# Altium PCB USB_Converter.PcbDoc
Units mm, origin at the board's own origin, x right, y up, seen from the top; angles counter-clockwise.
Board outline 30 x 14 mm, 2 copper layers (Top Layer, Bottom Layer); 8 components, 6 nets, 30 pads, 14 vias.
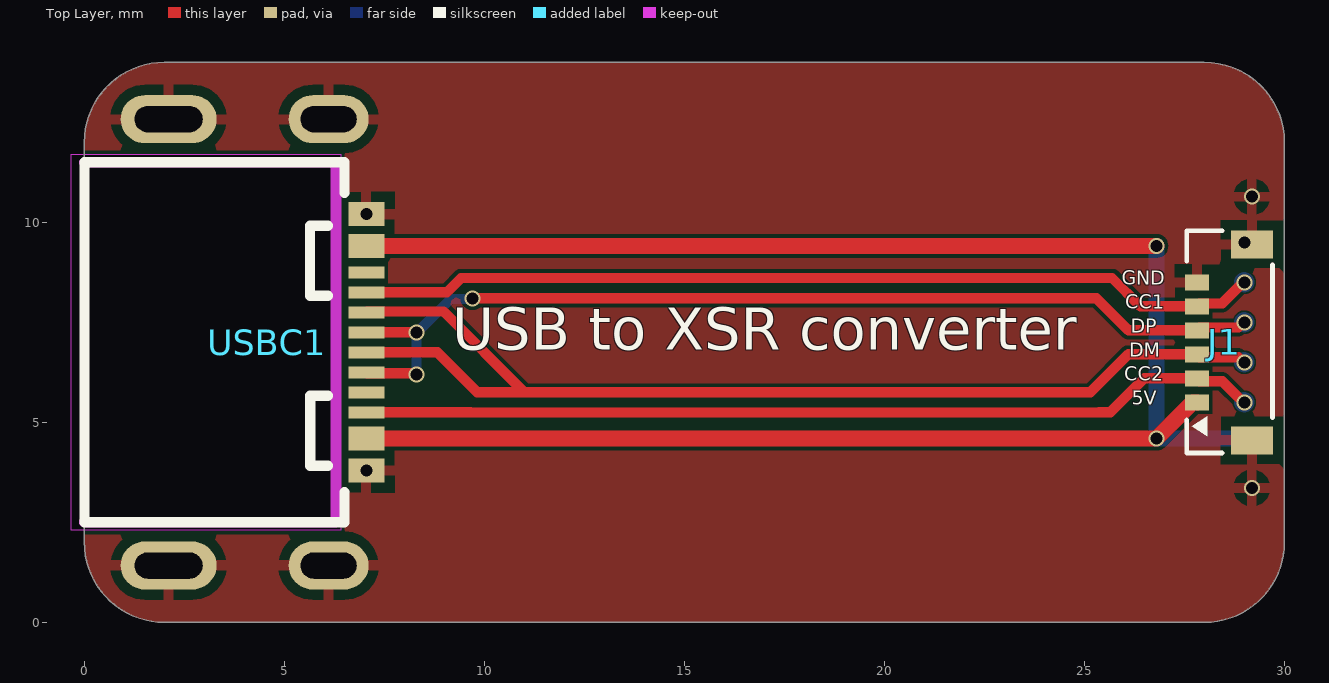
[diagram p0: Top Layer view]
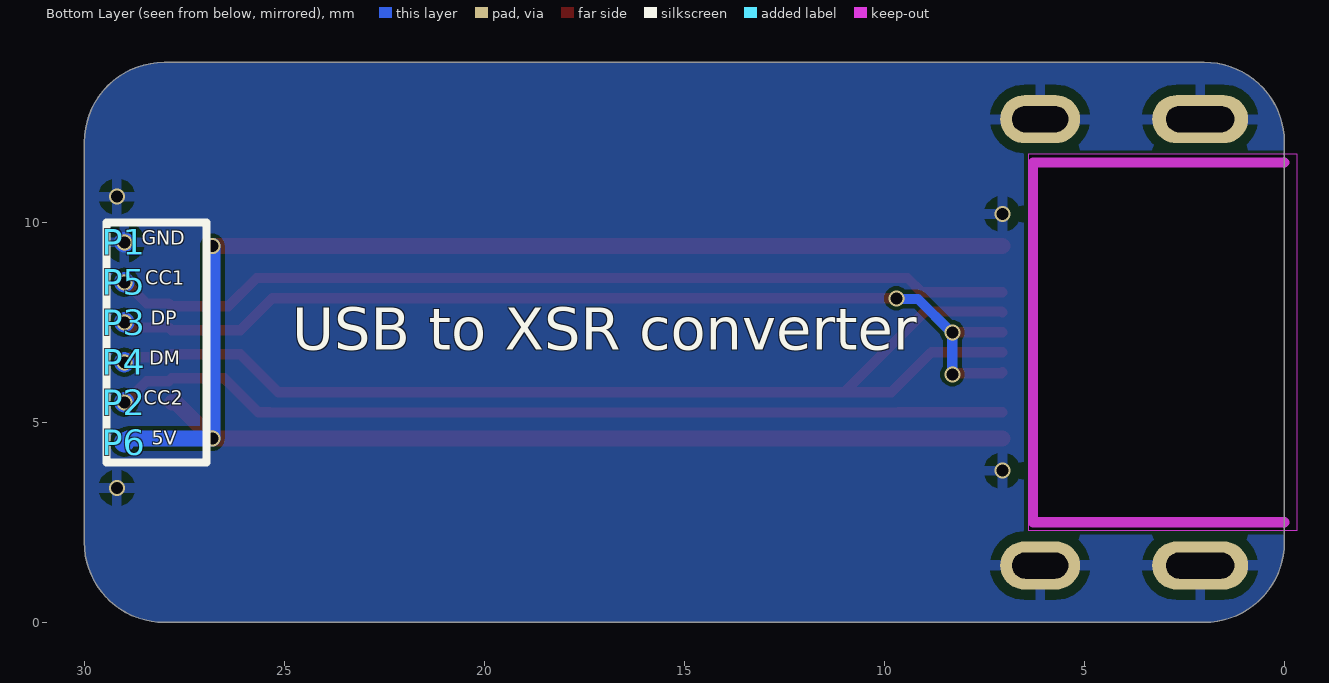
[diagram p1: Bottom Layer view, seen from below]

## Layer stack, top to bottom
Top Solder: solder mask 0.0102, Solder Resist, Dk 3.5
Top Layer: signal copper 0.0356
Dielectric 1: dielectric 0.32, FR-4, Dk 4.8
Bottom Layer: signal copper 0.0356
Bottom Solder: solder mask 0.0102, Solder Resist, Dk 3.5

## Board outline
0,2 0,12 cw(c2,12) 2,14 28,14 cw(c28,12) 30,12 30,2 cw(c28,2) 28,0 2,0 cw(c2,2)

## Design rules (kind name [scope] priority, off if disabled: settings)
AssemblyTestPointUsage [All] p1: isadvanced=TRUE
AssemblyTestpoint [All] p1: isadvanced=TRUE testpointundercomponent=TRUE minsize=1.016 maxsize=2.54 preferedsize=1.524 minholesize=0 maxholesize=1.016 preferedholesize=0.813 testpointgrid=0.025 usegrid=TRUE gridtolerance=0 allowsidetop=TRUE allowsidebottom=TRUE
Clearance Clearance_1 [OnMid vs OnMid] p1: gap=0.1 ignorepadtopadclearanceinfootprint=FALSE sourcerule=42 cellrowname=All cellrowtype=0 cellcolname=All cellcoltype=0 innerlayers=TRUE
Clearance Clearance_2 [(ExistsOnLayer('Top Layer') Or ExistsOnLayer('Bottom Layer')) vs (ExistsOnLayer('Top Layer') Or ExistsOnLayer('Bottom Layer'))] p2: gap=0.1 ignorepadtopadclearanceinfootprint=FALSE sourcerule=42 cellrowname=All cellrowtype=0 cellcolname=All cellcoltype=0 outerlayers=TRUE
Clearance [All] p3: gap=0.254 ignorepadtopadclearanceinfootprint=FALSE ismatrix=TRUE
ComponentClearance [All] p1: isadvanced=TRUE gap=0.254 collisioncheckmode=3 verticalgap=0.254 showdistances=FALSE
FabricationTestPointUsage [All] p1: isadvanced=TRUE valid=0 allowmultiple=FALSE
FabricationTestpoint [All] p1: isadvanced=TRUE side=3 testpointundercomponent=TRUE minsize=1.016 maxsize=2.54 preferedsize=1.524 minholesize=0 maxholesize=1.016 preferedholesize=0.813 testpointgrid=0.025 allowsidetop=TRUE allowsidebottom=TRUE usegrid=TRUE gridtolerance=0
FanoutControl Fanout_BGA [IsBGA] p1: isadvanced=TRUE bgadir=Out bgaviamode=Centered fanoutstyle=Auto fanoutdirection=Alternating viagrid=0.025 // Fanout_BGA (Default Rule)
FanoutControl Fanout_LCC [IsLCC] p2: isadvanced=TRUE bgadir=Out bgaviamode=Centered fanoutstyle=Auto fanoutdirection=Alternating viagrid=0.025 // Fanout_LCC (Default Rule)
FanoutControl Fanout_SOIC [IsSOIC] p3: isadvanced=TRUE bgadir=Out bgaviamode=Centered fanoutstyle=Auto fanoutdirection=Alternating viagrid=0.025 // Fanout_SOIC (Default Rule)
FanoutControl Fanout_Small [(CompPinCount < 5)] p4: isadvanced=TRUE bgadir=Out bgaviamode=Centered fanoutstyle=Auto fanoutdirection=OutThenIn viagrid=0.025 // Fanout_Small (Default Rule)
FanoutControl Fanout_Default [All] p5: isadvanced=TRUE bgadir=Out bgaviamode=Centered fanoutstyle=Auto fanoutdirection=Alternating viagrid=0.025 // Fanout_Default (Default Rule)
Height [All] p1: isadvanced=TRUE minheight=0 maxheight=25.4 prefheight=12.7
HoleSize [All] p1: isadvanced=TRUE absolutevalues=TRUE maxlimit=2.54 minlimit=0.025 maxpercent=80.000 minpercent=20.000
HoleToHoleClearance [All] p1: isadvanced=TRUE gap=0.254 allowstackedmicrovias=TRUE
LayerPairs [All] p1: isadvanced=TRUE enforce=TRUE
MinimumSolderMaskSliver [All] p1: isadvanced=TRUE minsoldermaskwidth=0.254
NetAntennae [All] p1: isadvanced=TRUE netantennaetolerance=0
PasteMaskExpansion [All] p1: isadvanced=TRUE expansion=0
PlaneClearance [All] p1: isadvanced=TRUE clearance=0.508
PlaneConnect [All] p1: isadvanced=TRUE planeconnectstyle=Relief reliefexpansion=0.508 reliefentries=4 reliefconductorwidth=0.254 reliefairgap=0.254
PolygonConnect [All] p1: connectstyle=Relief reliefconductorwidth=0.254 reliefentries=4 polygonreliefangle="90 Angle" airgapwidth=0.254
RoutingCorners [All] p1: isadvanced=TRUE cornerstyle=45-Degree minsetback=2.54 maxsetback=2.54
RoutingPriority [All] p1: isadvanced=TRUE routingpriority=0
RoutingVias [All] p1: holewidth=0.711 width=1.27 viastyle="Through Hole" minholewidth=0.711 minwidth=1.27 maxholewidth=0.711 maxwidth=1.27
ShortCircuit [All] p1: isadvanced=TRUE allowed=FALSE
SilkToSilkClearance [All] p1: isadvanced=TRUE silktosilkclearance=0.254
SilkToSolderMaskClearance [IsPad] p1: isadvanced=TRUE minsilkscreentomaskgap=0.254 clearancetoexposedcopper=TRUE
SolderMaskExpansion [All] p1: isadvanced=TRUE expansion=0.102 istentingtop=FALSE
SupplyNets "Schematic Supply Nets_5" [InNet('GND')] p1: isadvanced=TRUE voltage=0.000
SupplyNets "Schematic Supply Nets_4" [InNet('USB_5V')] p2: isadvanced=TRUE voltage=0.000
SupplyNets "Schematic Supply Nets_3" [InNet('GND')] p3: isadvanced=TRUE voltage=0.000
SupplyNets "Schematic Supply Nets_2" [InNet('USB_5V')] p4: isadvanced=TRUE voltage=0.000
SupplyNets "Schematic Supply Nets_1" [InNet('GND')] p5: isadvanced=TRUE voltage=0.000
SupplyNets "Schematic Supply Nets" [InNet('USB_5V')] p6: isadvanced=TRUE voltage=0.000
UnRoutedNet [All] p1: isadvanced=TRUE
UnpouredPolygon [All] p1: isadvanced=TRUE
Width [All] p1: maxlimit=5 minlimit=0.254 preferedwidth=0.254 minimp=50.000000 maximp=50.000000 favimp=50.000000
4 further rules are at their usual default settings.

## Components (designator, comment, footprint, x,y, rotation, side; value= is the part's Value field where it differs from the comment)
J1 "SM06B-XSRS-ETB(LF)(SN)" CONN-SMD_6P-P0.6 28.5,7 r90 top locked
P1 "BurnPad" BurnPad_0.5mm#1 28.9,4.5 r180 bottom
P2 "BurnPad" BurnPad_0.5mm#2 28.9,5.56 r180 bottom
P3 "BurnPad" BurnPad_0.5mm#3 28.9,6.62 r180 bottom
P4 "BurnPad" BurnPad_0.5mm#4 28.9,7.68 r180 bottom
P5 "BurnPad" BurnPad_0.5mm#5 28.9,8.74 r180 bottom
P6 "BurnPad" BurnPad_0.5mm#6 28.9,9.8 r180 bottom
USBC1 "918-418K2024S40000" USB-C-SMD_TYPE-C-USB-4 4.5,7 r270 top locked

## Footprints (in the part's own frame and the unit in brackets; to place one, negate y for a bottom-side part, rotate by r counter-clockwise, add the part's x,y. Pads: shape width x height; smd on the part's side, far side on the other; paste and mask are expansions set on the pad)
BurnPad_0.5mm#1 [mm]
  round 0.025 smd mask+0.05: 1(-0.1,5)
  Top Layer region: -0.35,5 -0.331,4.904 -0.277,4.823 -0.196,4.769 -0.1,4.75 -0.1,4.75 -0.004,4.769 0.077,4.823 0.131,4.904 0.15,5 0.15,5 0.131,5.096 0.077,5.177 -0.004,5.231 -0.1,5.25 -0.1,5.25 -0.196,5.231 -0.277,5.177 -0.331,5.096 -0.35,5
BurnPad_0.5mm#2 [mm]
  round 0.025 smd mask+0.05: 1(-0.1,-0.06)
  Top Layer region: -0.35,-0.06 -0.331,-0.156 -0.277,-0.237 -0.196,-0.291 -0.1,-0.31 -0.1,-0.31 -0.004,-0.291 0.077,-0.237 0.131,-0.156 0.15,-0.06 0.15,-0.06 0.131,0.036 0.077,0.117 -0.004,0.171 -0.1,0.19 -0.1,0.19 -0.196,0.171 -0.277,0.117 -0.331,0.036 -0.35,-0.06
BurnPad_0.5mm#3 [mm]
  round 0.025 smd mask+0.05: 1(-0.1,0.88)
  Top Layer region: -0.35,0.88 -0.331,0.784 -0.277,0.703 -0.196,0.649 -0.1,0.63 -0.1,0.63 -0.004,0.649 0.077,0.703 0.131,0.784 0.15,0.88 0.15,0.88 0.131,0.976 0.077,1.057 -0.004,1.111 -0.1,1.13 -0.1,1.13 -0.196,1.111 -0.277,1.057 -0.331,0.976 -0.35,0.88
BurnPad_0.5mm#4 [mm]
  round 0.025 smd mask+0.05: 1(-0.1,-1.18)
  Top Layer region: -0.35,-1.18 -0.331,-1.276 -0.277,-1.357 -0.196,-1.411 -0.1,-1.43 -0.1,-1.43 -0.004,-1.411 0.077,-1.357 0.131,-1.276 0.15,-1.18 0.15,-1.18 0.131,-1.084 0.077,-1.003 -0.004,-0.949 -0.1,-0.93 -0.1,-0.93 -0.196,-0.949 -0.277,-1.003 -0.331,-1.084 -0.35,-1.18
BurnPad_0.5mm#5 [mm]
  round 0.025 smd mask+0.05: 1(-0.1,-0.24)
  Top Layer region: -0.35,-0.24 -0.331,-0.336 -0.277,-0.417 -0.196,-0.471 -0.1,-0.49 -0.1,-0.49 -0.004,-0.471 0.077,-0.417 0.131,-0.336 0.15,-0.24 0.15,-0.24 0.131,-0.144 0.077,-0.063 -0.004,-0.009 -0.1,0.01 -0.1,0.01 -0.196,-0.009 -0.277,-0.063 -0.331,-0.144 -0.35,-0.24
BurnPad_0.5mm#6 [mm]
  round 0.025 smd mask+0.05: 1(-0.1,-5.3)
  Top Layer region: -0.35,-5.3 -0.331,-5.396 -0.277,-5.477 -0.196,-5.531 -0.1,-5.55 -0.1,-5.55 -0.004,-5.531 0.077,-5.477 0.131,-5.396 0.15,-5.3 0.15,-5.3 0.131,-5.204 0.077,-5.123 -0.004,-5.069 -0.1,-5.05 -0.1,-5.05 -0.196,-5.069 -0.277,-5.123 -0.331,-5.204 -0.35,-5.3
CONN-SMD_6P-P0.6 [mm]
  rect 0.4x0.6 smd paste+0 mask+0.05: 1(-1.5,0.687) 2(-0.9,0.687) 3(-0.3,0.687) 4(0.3,0.687) 5(0.9,0.687) 6(1.5,0.687)
  rect 0.7x1.05 smd paste+0 mask+0.05: 7(-2.45,-0.687) 8(2.45,-0.687)
  silkscreen extent -2.77,-1.2 2.79,0.94, body extent -2.7,-1.13 2.7,0.89, height 1.6
USB-C-SMD_TYPE-C-USB-4 [mm]
  oval 1.2x2 hole 0.65 slot 1.4 at 90 deg: 13(5.58,1.605) 16(-5.58,1.605)
  oval 1.2x2.4 hole 0.65 slot 1.7 at 90 deg: 14(5.58,-2.395) 15(-5.58,-2.395)
  rect 0.3x0.9 smd mask+0.051: A5(-1.25,2.55) A6(-0.25,2.55) A7(0.25,2.55) A8(1.25,2.55) B5(1.75,2.55) B6(0.75,2.55) B7(-0.75,2.55) B8(-1.75,2.55)
  rect 0.6x0.9 smd mask+0.051: A9B4(2.41,2.55) A12B1(3.21,2.55) B9A4(-2.41,2.55) B12A1(-3.21,2.55)
  Keep-Out Layer board cut-out: -4.699,-4.826 -4.699,1.905 4.699,1.905 4.699,-4.826
  Keep-Out Layer lines w0.254: 4.499,1.78 4.499,-4.501 4.499,1.78 ; 4.499,1.78 -4.5,1.78 ; -4.5,1.78 -4.5,-4.501 -4.5,1.78
  silkscreen extent -4.5,-4.5 4.5,2, body extent -5.77,-4.57 5.77,2.63, height 1.86

## Part data
J1: Current Rating (Max)=200mA, JLCPCB Part Class="Extended Part", Manufacturer=JST, Operating Temperature Range=-25℃~+85℃, Add into BOM=yes, Contact Material=铜合金, Contact Plating=锡, Convert to PCB=yes, Datasheet=https://atta.szlcsc.com/upload/public/pdf/source/20211104/F92F039D0CBA277DB4B3F7158FB08335.pdf, Device=SM06B-XSRS-ETB(LF)(SN), LCSC Part Name=SM06B-XSRS-ETB(LF)(SN), Manufacturer Part=SM06B-XSRS-ETB(LF)(SN), Mounting Style=卧贴, Number of Rows=1, Pitch=0.6mm, Supplier=LCSC, Supplier Footprint=SMD,P=0.6mm,卧贴, Supplier Part=C5306600, Symbol=SM06B-XSRS-ETB(LF)(SN)
USBC1: JLCPCB Part Class="Extended Part", LCSC Part Name="Type-C 母座", Manufacturer=精拓金, Add into BOM=yes, Connector Type=Type-C, Convert to PCB=yes, Datasheet=https://atta.szlcsc.com/upload/public/pdf/source/20230504/AD68741A173EB676C7BDD03FFA4DE90F.pdf, Device=918-418K2024S40000, Gender=母座, Manufacturer Part=918-418K2024S40000, Name=918-418K2024S40000, Number of Contacts=16P, Number of Ports=1, Standard=-, Supplier=LCSC, Supplier Footprint=SMD, Supplier Part=C168688, Symbol="TYPE-C 3.1 MT 16P_C168688"

## Via types
v1: diameter 0.4, hole 0.3, Top Layer to Bottom Layer, tented both sides, 14 vias

## Nets (pads, with @x,y where several pads share a name; then routed paths per layer and width w, separated by ;. In a path a pad name is that pad's centre, name@x,y a point inside that pad or via, vN(x,y) a via of type N, cw(c..) or ccw(c..) an arc to the next point about the centre after c; other vN are vias at no path point)
GND: J1.6 J1.7 J1.8 P1.1 USBC1.13 USBC1.14 USBC1.15 USBC1.16 USBC1.A12B1 USBC1.B12A1
  other v1: 29.187,3.358 7.05,3.79 29,9.5 7.05,10.21 29.187,10.642
USB_5V: J1.1 P6.1 USBC1.A9B4 USBC1.B9A4 | length 47.9
  Top Layer w0.4: USBC1.A9B4 v1(26.8,4.59) 26.802,4.59 27.713,5.5 J1.1 ; USBC1.B9A4 v1(26.8,9.41)
  Bottom Layer w0.4: v1(26.8,9.41) v1(26.8,4.59) 28.91,4.59 P6.1
USB_CC1: J1.5 P5.1 USBC1.A5 | length 22.6
  Top Layer w0.254: USBC1.A5 9.064,8.25 9.422,8.608 25.692,8.608 26.4,7.9 J1.5 27.886,7.973 28.447,7.973 28.974,8.5 v1(29,8.5)
USB_CC2: J1.2 P2.1 USBC1.B5 | length 22.6
  Top Layer w0.254: USBC1.B5 9.657,5.25 9.666,5.242 25.36,5.242 25.368,5.25 25.65,5.25 26.5,6.1 J1.2 27.886,6.027 28.447,6.027 28.974,5.5 v1(29,5.5)
USB_D+: J1.4 P3.1 USBC1.A6 USBC1.B6 | length 25
  Top Layer w0.254: USBC1.B6 7.073,6.227 8.247,6.227 8.274,6.2 v1(8.3,6.2) ; USBC1.A6 v1(8.3,7.25) ; v1(9.7,8.1) 25.3,8.1 26.1,7.3 J1.4 27.886,7.373 28.847,7.373 28.974,7.5 v1(29,7.5)
  Bottom Layer w0.254: v1(8.3,6.2) v1(8.3,7.25) 8.326,7.25 9.158,8.082 9.682,8.082 v1(9.7,8.1)
USB_D-: J1.3 P4.1 USBC1.A7 USBC1.B7 | length 27.6
  Top Layer w0.254: USBC1.A7 8.824,6.75 9.824,5.75 11,5.75 ; USBC1.B7 7.073,7.773 8.977,7.773 11,5.75 ; v1(29,6.5) 28.974,6.5 28.847,6.627 27.886,6.627 J1.3 26.1,6.7 25.15,5.75 11,5.75
pads on no net: USBC1.A8 USBC1.B8

## Polygon pours and split planes (outlines as drawn)
GND on Top Layer "NONET_L-01_P-001" (solid, pour order 0): 0,2 0,12 cw(c2,12) 2,14 28,14 cw(c28,12) 30,12 30,2 cw(c28,2) 28,0 2,0 cw(c2,2)
GND on Bottom Layer "NONET_L-01_P-001" (solid, pour order 1): 0,2 ccw(c2,2) 2,0 28,0 ccw(c28,2) 30,2 30,12 ccw(c28,12) 28,14 2,14 ccw(c2,12) 0,12

## Silkscreen, mask and mechanical layers (free items; w line width, h text height)
Top Overlay:
  text "GND" at 25.931,8.309 h0.6
  text "CC1" at 26.021,7.709 h0.6
  text "DP" at 26.16,7.108 h0.6
  text "DM" at 26.122,6.508 h0.6
  text "USB to XSR converter" at 9.202,6.463 h1.8
  text "CC2" at 25.991,5.909 h0.6
  text "5V" at 26.185,5.312 h0.6
Bottom Overlay:
  lines w0.2: 26.95,4 29.45,4 29.45,10 26.95,10 26.95,4
  text "GND" at 28.569,9.309 h0.6
  text "CC1" at 28.479,8.309 h0.6
  text "DP" at 28.34,7.308 h0.6
  text "USB to XSR converter" at 24.798,6.463 h1.8
  text "DM" at 28.378,6.308 h0.6
  text "CC2" at 28.509,5.309 h0.6
  text "5V" at 28.315,4.312 h0.6
Mechanical 1:
  the board outline again, w0.1